# EAGLE board motor_shield__SD_v1.1 - Ryan (EAGLE 8.1.1)

Size 91.87 x 51.3 mm. Coordinates in mm from the lower left corner, seen from the top.
Outline: 0,0 91.87,0 91.87,51.3 0,51.3 0,0
Copper layers (1*16): Top 0.035mm / dielectric 1.5mm / Bottom 0.035mm
Design rules "default": minimum track width 10mil, minimum drill 24mil, track to track 8mil, track to pad 8mil, pad to pad 8mil, via to via 8mil, smd to smd 8mil, copper to edge 40mil, drill to drill 8mil, minimum pad ring 10mil, minimum via ring 8mil, stop-mask expansion 4mil, vias tented up to drill 0mil, thermal gap 10mil

## Footprints (pad centres in the part's own frame; a part is rotated, then mirrored left to right if it is on the bottom)
1X19 = drill 1.016 pad 1.88: 1 0,0; 2 2.54,0; 3 5.08,0; 4 7.62,0; 5 10.16,0; 6 12.7,0; 7 15.24,0; 8 17.78,0; 9 20.32,0; 10 22.86,0; 11 25.4,0; 12 27.94,0; 13 30.48,0; 14 33.02,0; 15 35.56,0; 16 38.1,0; 17 40.64,0; 18 43.18,0; 19 45.72,0
2X10 = drill 1.016 pad 1.88: 1 0,0; 2 0,2.54; 3 2.54,0; 4 2.54,2.54; 5 5.08,0; 6 5.08,2.54; 7 7.62,0; 8 7.62,2.54; 9 10.16,0; 10 10.16,2.54; 11 12.7,0; 12 12.7,2.54; 13 15.24,0; 14 15.24,2.54; 15 17.78,0; 16 17.78,2.54; 17 20.32,0; 18 20.32,2.54; 19 22.86,0; 20 22.86,2.54
CHIPLED_0805 = smd 1.2 x 1.2: A 0,-1.05; C 0,1.05
SOT23 = smd 1 x 1.4: 1 -0.95,-1.1; 2 0.95,-1.1; 3 0,1.1
PHOENIX_3POS = drill 1.8 long: 1 5.48,11.88; 2 5.48,6.8; 3 5.48,1.72; 4 15.64,11.88; 5 15.64,6.8; 6 15.64,1.72; 7 25.8,11.88; 8 25.8,6.8; 9 25.8,1.72
1X16_LOCK = drill 1.016 pad 1.88: 1 0,0.127; 2 2.54,-0.127; 3 5.08,0.127; 4 7.62,-0.127; 5 10.16,0.127; 6 12.7,-0.127; 7 15.24,0.127; 8 17.78,-0.127; 9 20.32,0.127; 10 22.86,-0.127; 11 25.4,0.127; 12 27.94,-0.127; 13 30.48,0.127; 14 33.02,-0.127; 15 35.56,0.127; 16 38.1,-0.127
1X11 = drill 1.016 pad 1.88: 1 0,0; 2 2.54,0; 3 5.08,0; 4 7.62,0; 5 10.16,0; 6 12.7,0; 7 15.24,0; 8 17.78,0; 9 20.32,0; 10 22.86,0; 11 25.4,0
PHOENIX_2POS = drill 1.8 long: 1 5.48,1.72; 2 5.48,6.8; 3 5.48,11.88; 4 15.64,11.88; 5 15.64,6.8; 6 15.64,1.72
R0603 = smd 1 x 1.1: 1 -0.85,0; 2 0.85,0
PB-53261-05 = smd 0.8 x 1.6: 1 -2.5,1.1; 2 -1.25,1.1; 3 0,1.1; 4 1.25,1.1; 5 2.5,1.1 | smd 2.1 x 3: MNT1 -5.05,-1.8; MNT2 5.05,-1.8

## Placement (x,y rotation side)
J1  [1X19]  116.84,3.81 90 top  (outside the outline)
J2  [2X10]  30.23,2.54 0 top
J3  [2X10]  30.23,45.72 0 top
LED1  [CHIPLED_0805]  68.33,49.02 90 top
LED2  [CHIPLED_0805]  58.17,49.02 90 top
LED3  [CHIPLED_0805]  53.09,49.02 90 top
LED4  [CHIPLED_0805]  63.25,49.02 90 top
MN1  [SOT23]  10.16,12.95 270 top
MN2  [SOT23]  10.16,30.99 270 top
MN3  [SOT23]  10.16,34.54 270 top
MN4  [SOT23]  10.16,16.51 270 top
MOTOR  PHOENIX_3POS  [PHOENIX_3POS]  91.19,-1.52 90 top
P1  [1X16_LOCK]  3.81,6.35 90 top
P2_1  [1X11]  67.06,31.75 270 top
P2_2  [1X11]  59.44,31.75 270 top
P3_1  [1X11]  56.9,31.75 270 top
P3_2  [1X11]  69.6,31.75 270 top
POWER  PHOENIX_2POS  [PHOENIX_2POS]  91.19,30.23 90 top
R1  220  [R0603]  68.58,45.97 180 top
R2  220  [R0603]  58.42,45.97 180 top
R3  220  [R0603]  53.34,45.97 180 top
R4  220  [R0603]  63.5,45.97 180 top
X1  [PB-53261-05]  13.97,46.23 180 bottom

## Library data of the parts
J1-J3 P1 P2_1 P2_2 P3_1 P3_2 = SparkFun-Connectors
LED1-LED4 R1-R4 = adafruit
MN1-MN4 = sym
MOTOR = phoenixConn_3POS
POWER = phoenixConn_2POS
X1 = pel_molex

## Nets
3.3V: J2.1
5V: J2.2
*INHIBIT: MN4.1 P1.5
+5V: R1.2 R2.2 R3.2 R4.2
CURRENT_MONITOR: MN1.1 P1.4
CURRENT_REF: MN2.1 P1.11
DIRECTION: J2.20 P1.3
FAULT_OUT: MN3.1 P1.12
GND: J2.4 J3.2 MN1.2 MN2.2 MN3.2 MN4.2 P1.2 X1.2
GND_HALL: P1.7
HALL1: P1.8 X1.3
HALL2: P1.9 X1.4
HALL3: P1.10 X1.5
HIGH_VOL: P2_1.1 P2_1.2 P2_2.1 P2_2.2 P3_1.1 P3_1.2 P3_2.1 P3_2.2 POWER.4 POWER.5 POWER.6
MOTOR_A: MOTOR.1 MOTOR.2 MOTOR.3 P2_1.10 P2_1.11 P2_2.10 P2_2.11 P3_1.10 P3_1.11 P3_2.10 P3_2.11
MOTOR_B: MOTOR.4 MOTOR.5 MOTOR.6 P2_1.8 P2_1.9 P2_2.8 P2_2.9 P3_1.8 P3_1.9 P3_2.8 P3_2.9
MOTOR_C: MOTOR.7 MOTOR.8 MOTOR.9 P2_1.6 P2_1.7 P2_2.6 P2_2.7 P3_1.6 P3_1.7 P3_2.6 P3_2.7
N$1: LED1.A R1.1
N$2: LED2.A R2.1
N$3: J2.6
N$4: J2.8
N$5: J2.10
N$6: J2.12
N$7: J2.14
N$8: J2.16
N$9: J2.18
N$10: LED3.A R3.1
N$11: LED4.A R4.1
N$12: J3.4
N$13: J3.6
N$14: J3.8
N$15: LED1.C MN1.3
N$16: LED2.C MN2.3
N$17: J3.14
N$18: J3.16
N$19: J3.18
N$20: J3.20
N$21: J2.19
N$22: J2.17
N$23: J2.15
N$24: J2.13
N$25: J2.11
N$26: J2.9
N$27: J2.7
N$28: J2.5
N$29: J2.3
N$30: LED3.C MN3.3
N$31: J3.1
N$32: J3.3
N$33: J3.5
N$34: J3.7
N$35: J3.9
N$36: J3.11
N$37: J3.15
N$38: J3.13
N$39: J3.17
N$40: J3.19
N$41: LED4.C MN4.3
PWM: J3.12 P1.1
PWR_GND: P2_1.4 P2_1.5 P2_2.4 P2_2.5 P3_1.4 P3_1.5 P3_2.4 P3_2.5 POWER.1 POWER.2 POWER.3
RESET: J3.10
V+_HALL: P1.6 X1.1

## Tracks (layer width: path | path; a pad name or v marks a point on that pad's centre or on a via)
*INHIBIT  (1 unrouted)
+5V  (3 unrouted)
CURRENT_MONITOR  (1 unrouted)
CURRENT_REF  (1 unrouted)
DIRECTION  (1 unrouted)
FAULT_OUT  (1 unrouted)
GND  (7 unrouted)
HALL1  (1 unrouted)
HALL2  (1 unrouted)
HALL3  (1 unrouted)
HIGH_VOL  (10 unrouted)
MOTOR_A  (10 unrouted)
MOTOR_B  (10 unrouted)
MOTOR_C  (10 unrouted)
N$1  (1 unrouted)
N$2  (1 unrouted)
N$10  (1 unrouted)
N$11  (1 unrouted)
N$15  (1 unrouted)
N$16  (1 unrouted)
N$30  (1 unrouted)
N$41  (1 unrouted)
PWM  (1 unrouted)
PWR_GND  (10 unrouted)
V+_HALL  (1 unrouted)

## Text on the board
tPlace: Hall | GND | C | Motor Shield V1.2 | B | A | 1